# Altium PCB slave_card_pcb.PcbDoc (part 1 of 2)
Units mm, origin at the board's own origin, x right, y up, seen from the top; angles counter-clockwise.
Board outline 165 x 187.5 mm, 4 copper layers (Top Layer, Int1 (GND), Int2 (PWR), Bottom Layer), stack 1.369 mm thick; 87 components, 83 nets, 381 pads, 109 vias.
Unrouted connection lines stored in the file: 1.
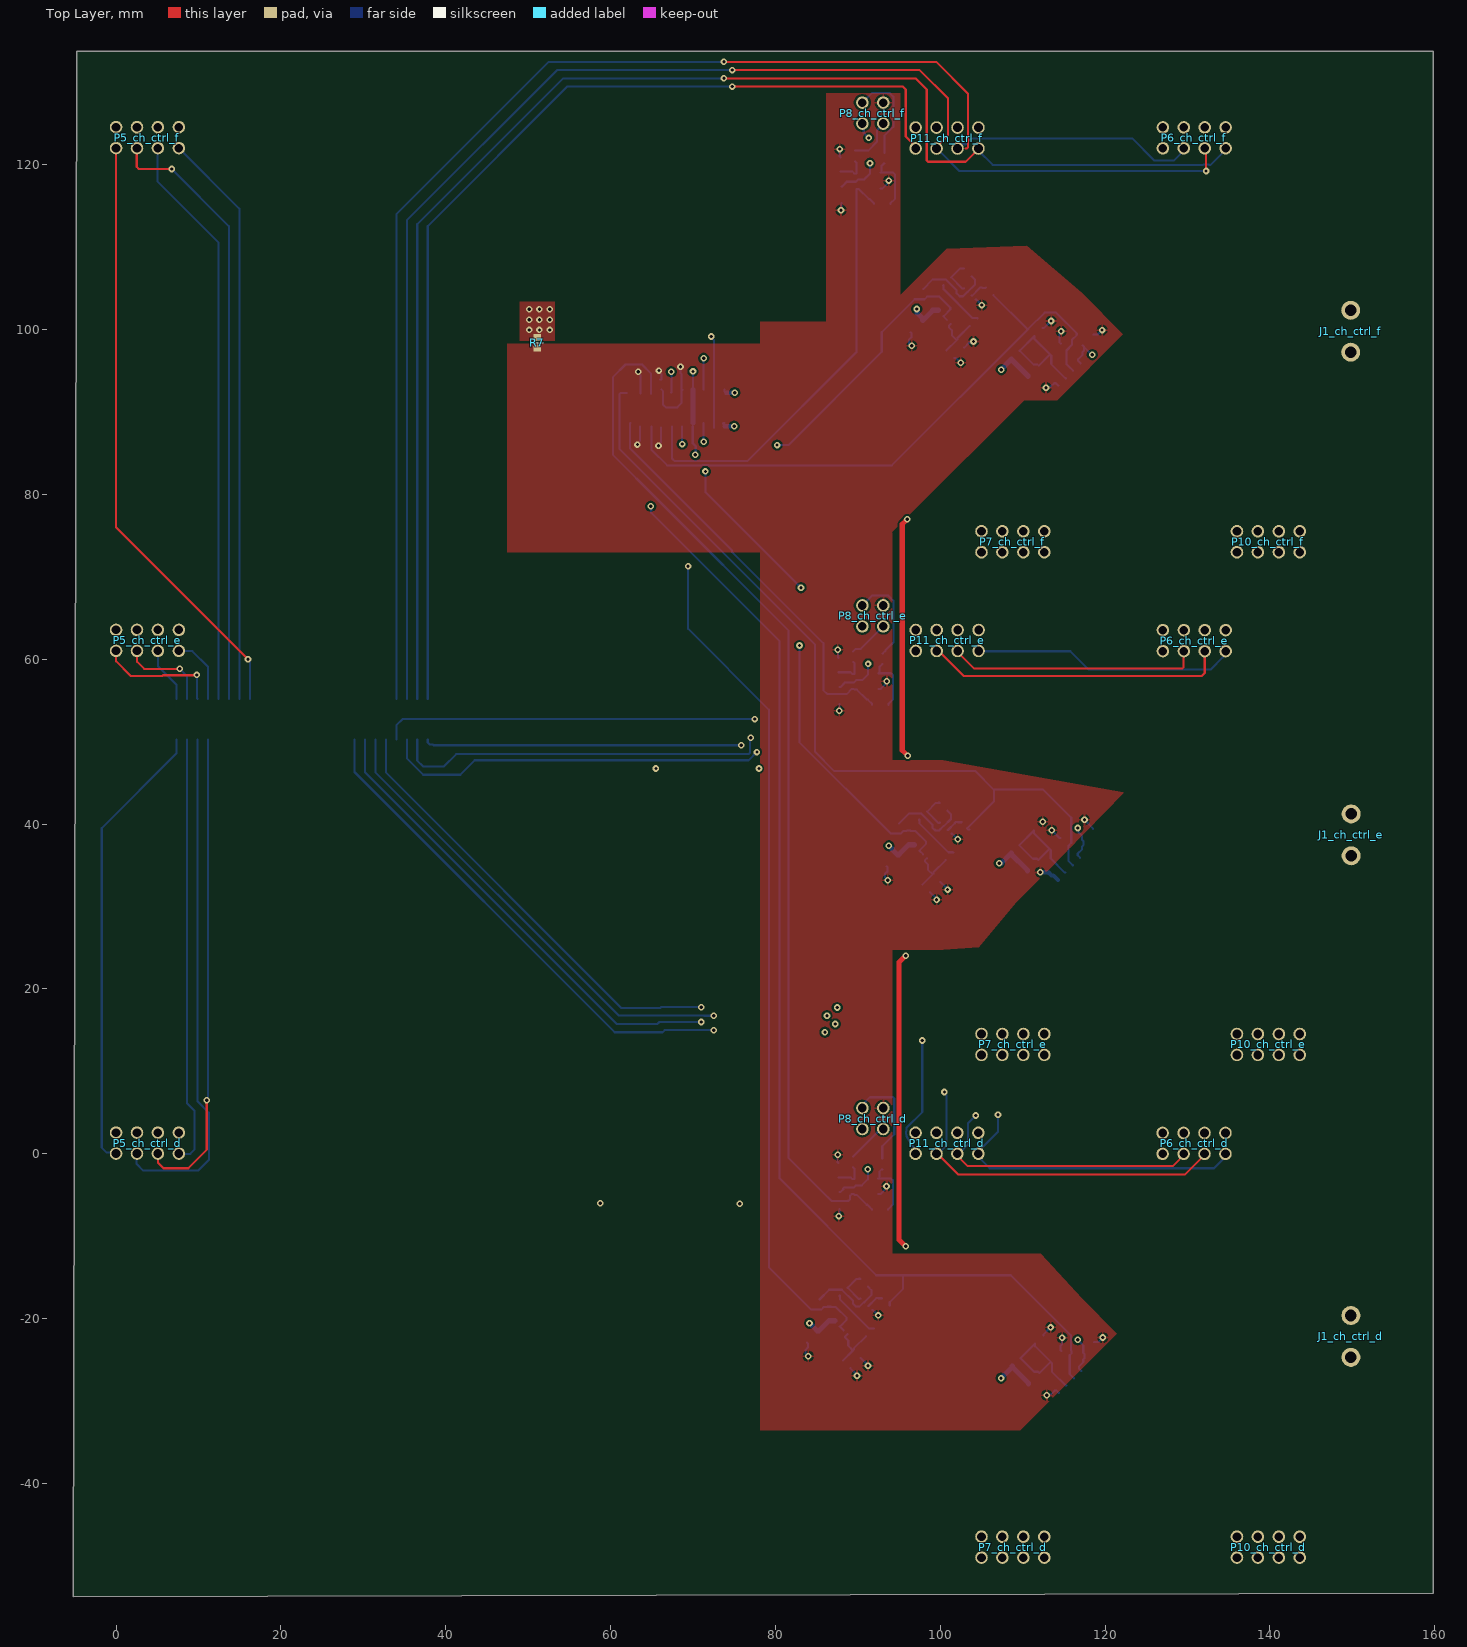
[diagram p0: Top Layer view]
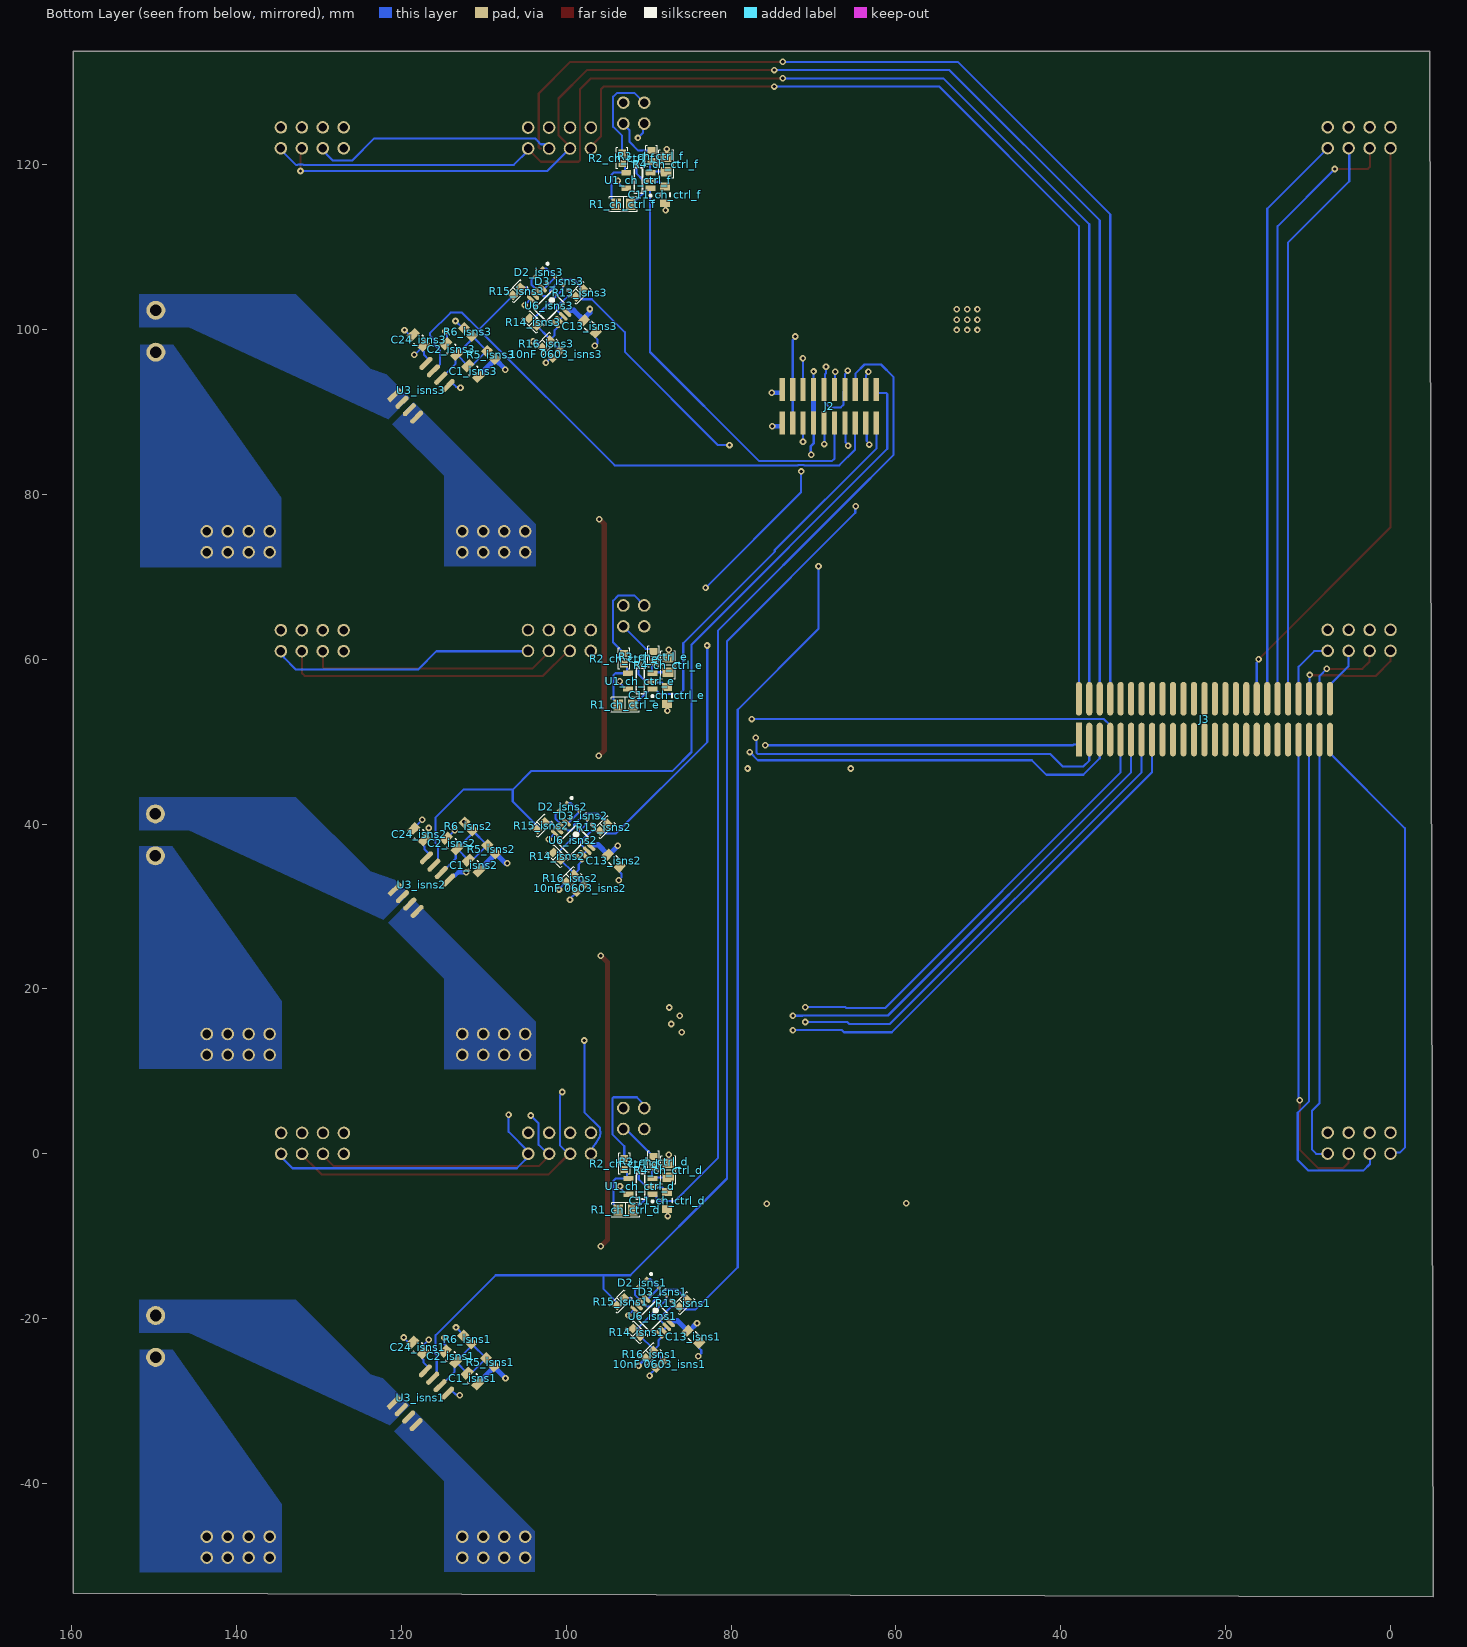
[diagram p1: Bottom Layer view, seen from below]
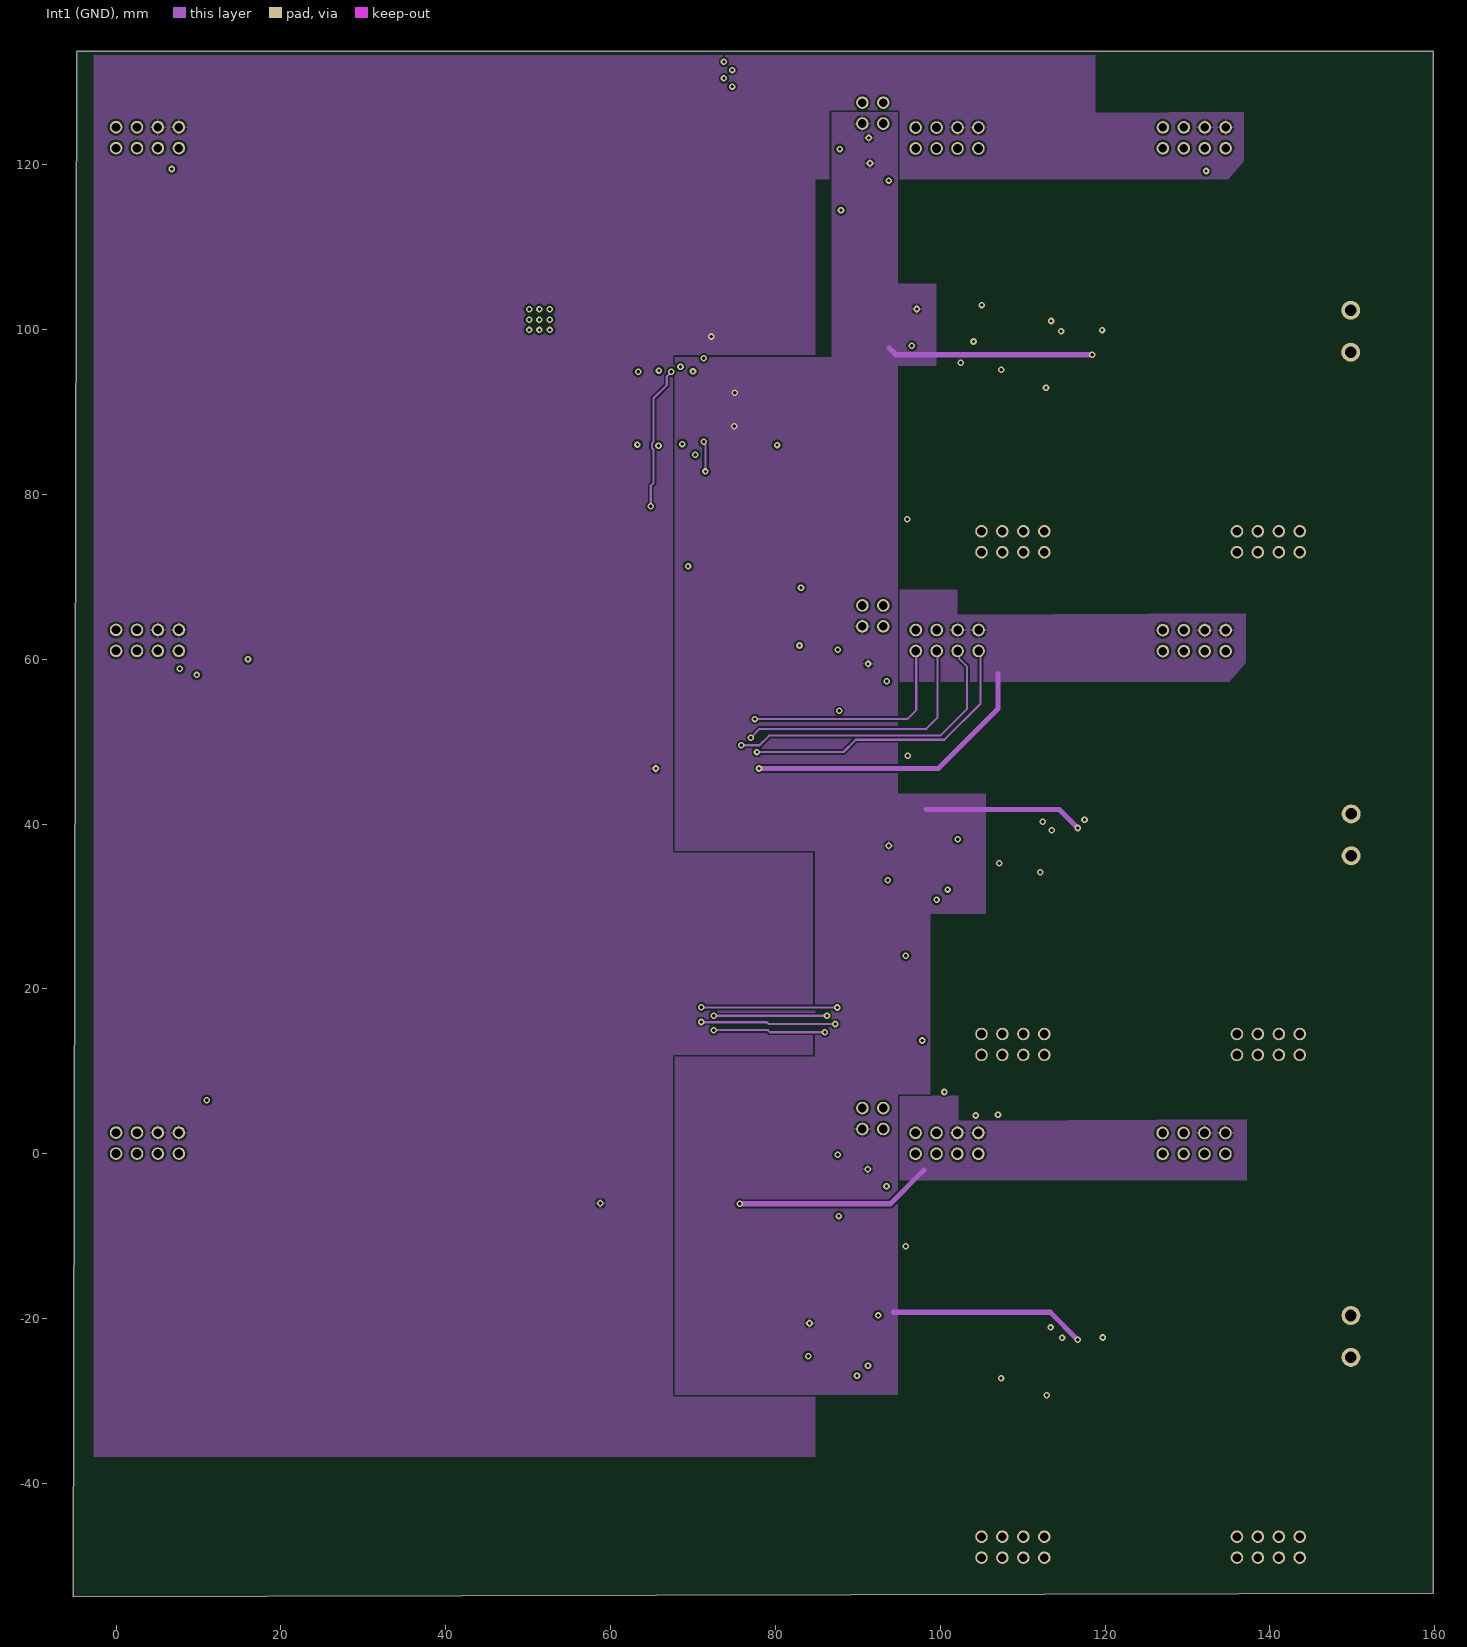
[diagram p2: Int1 (GND)]
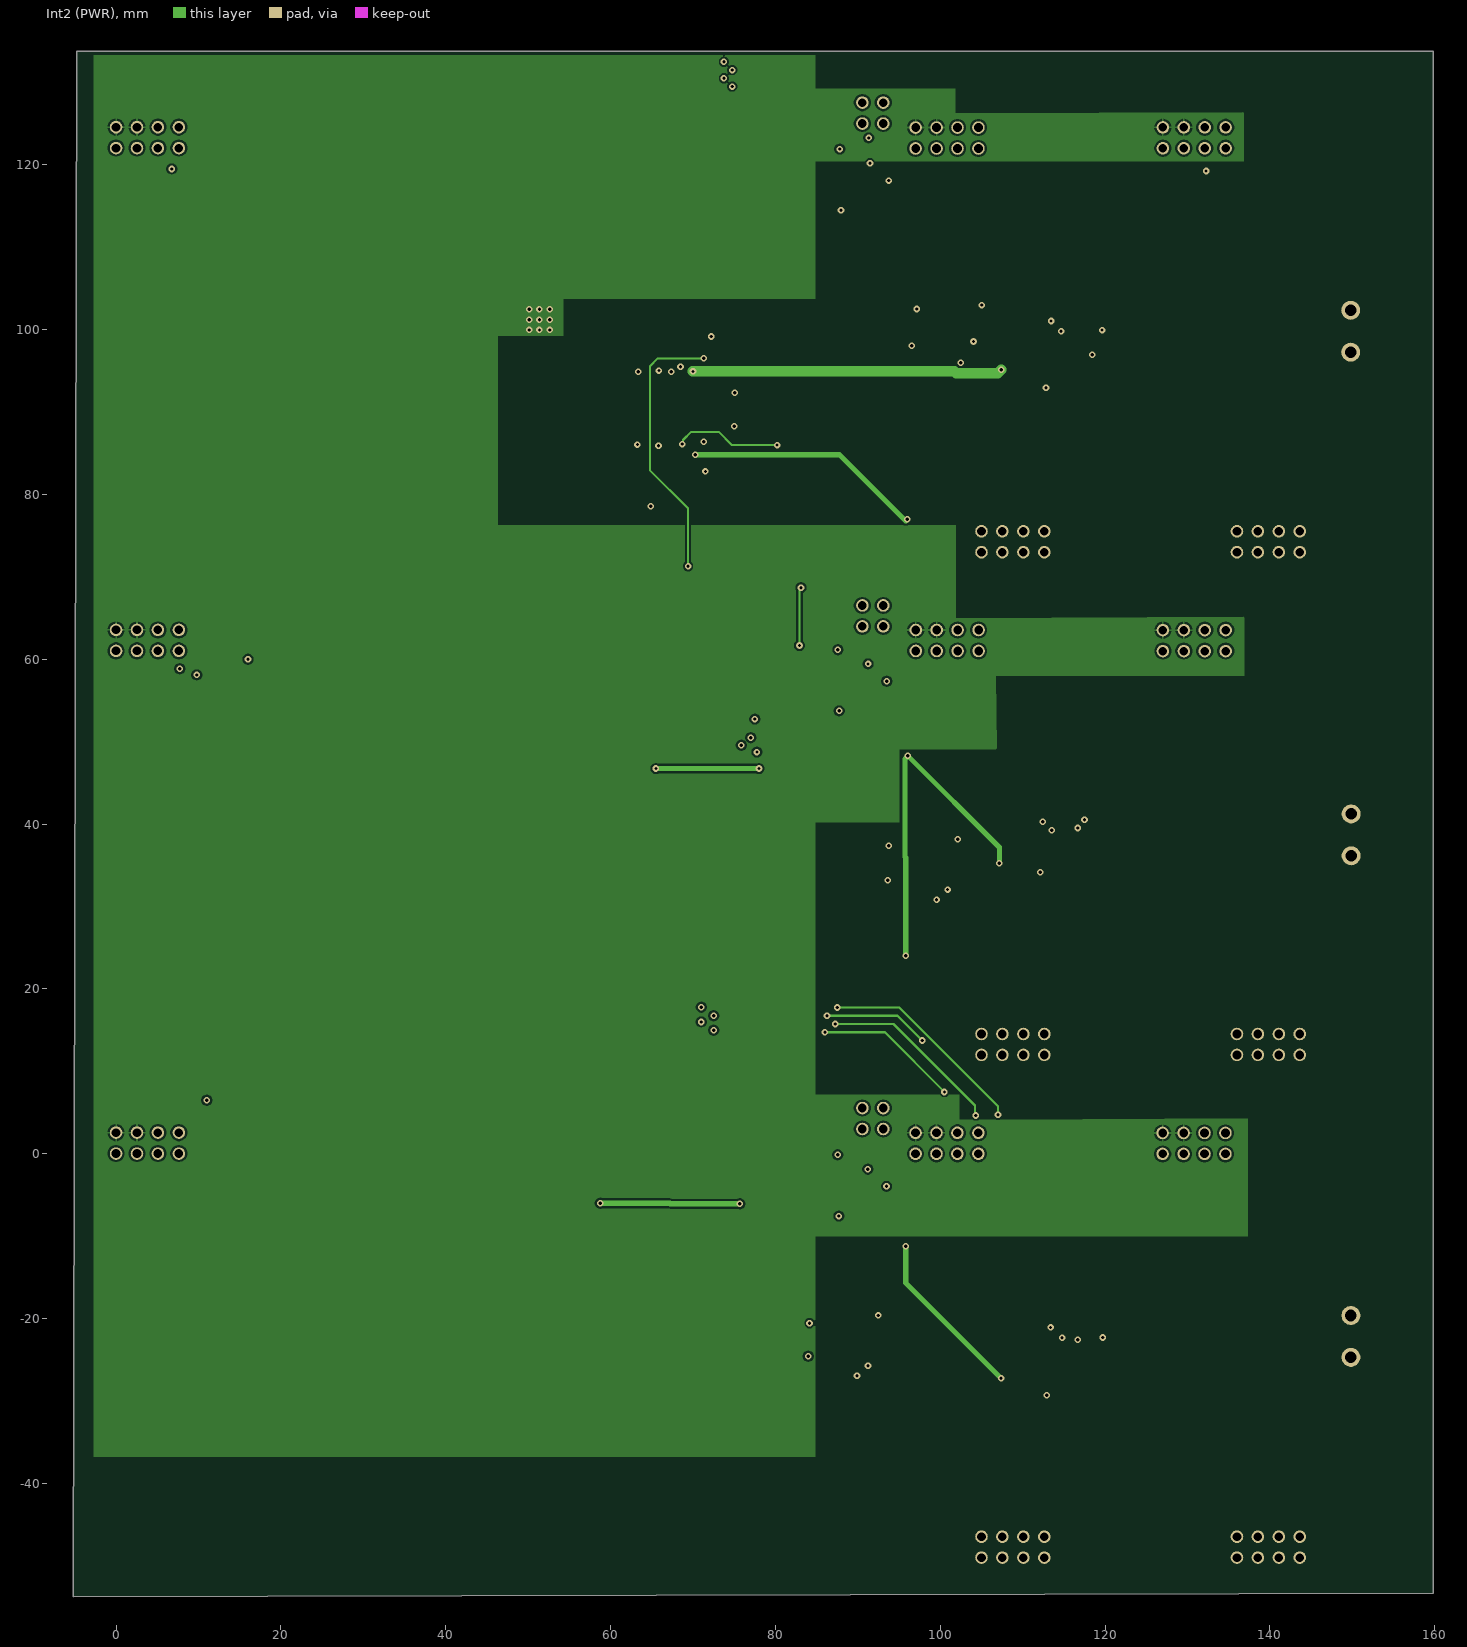
[diagram p3: Int2 (PWR)]
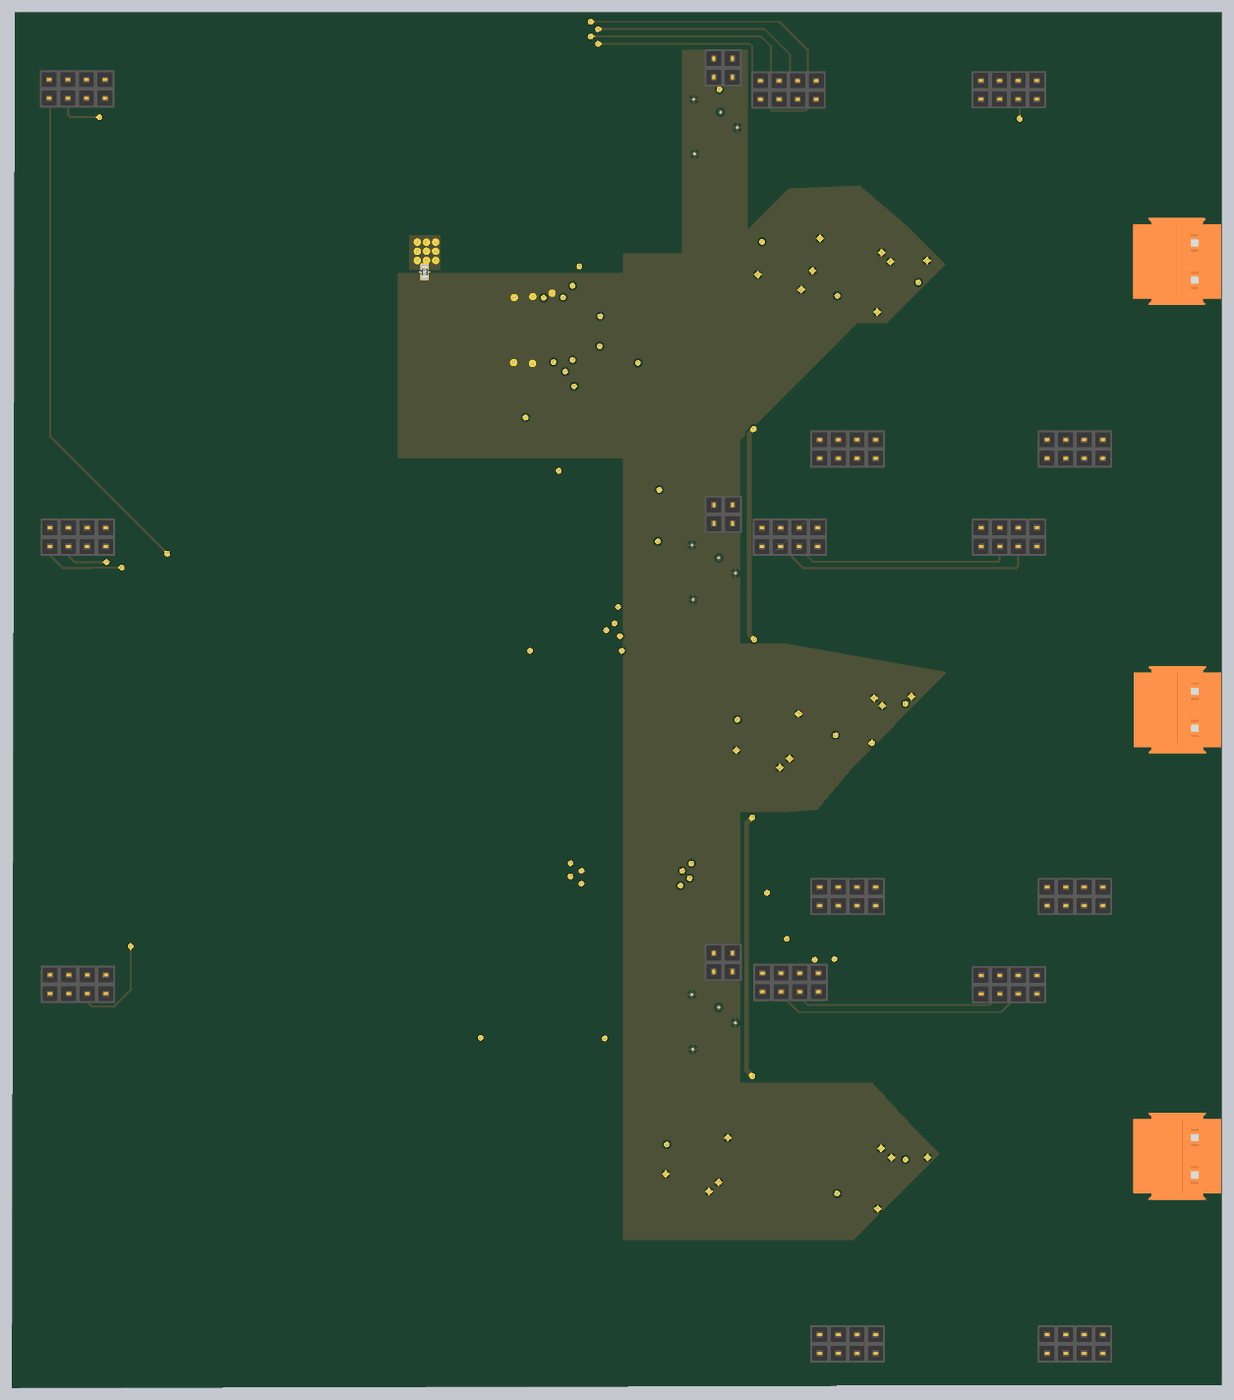
[diagram p5: 3D render of the assembled board from above, using the file's embedded part models]
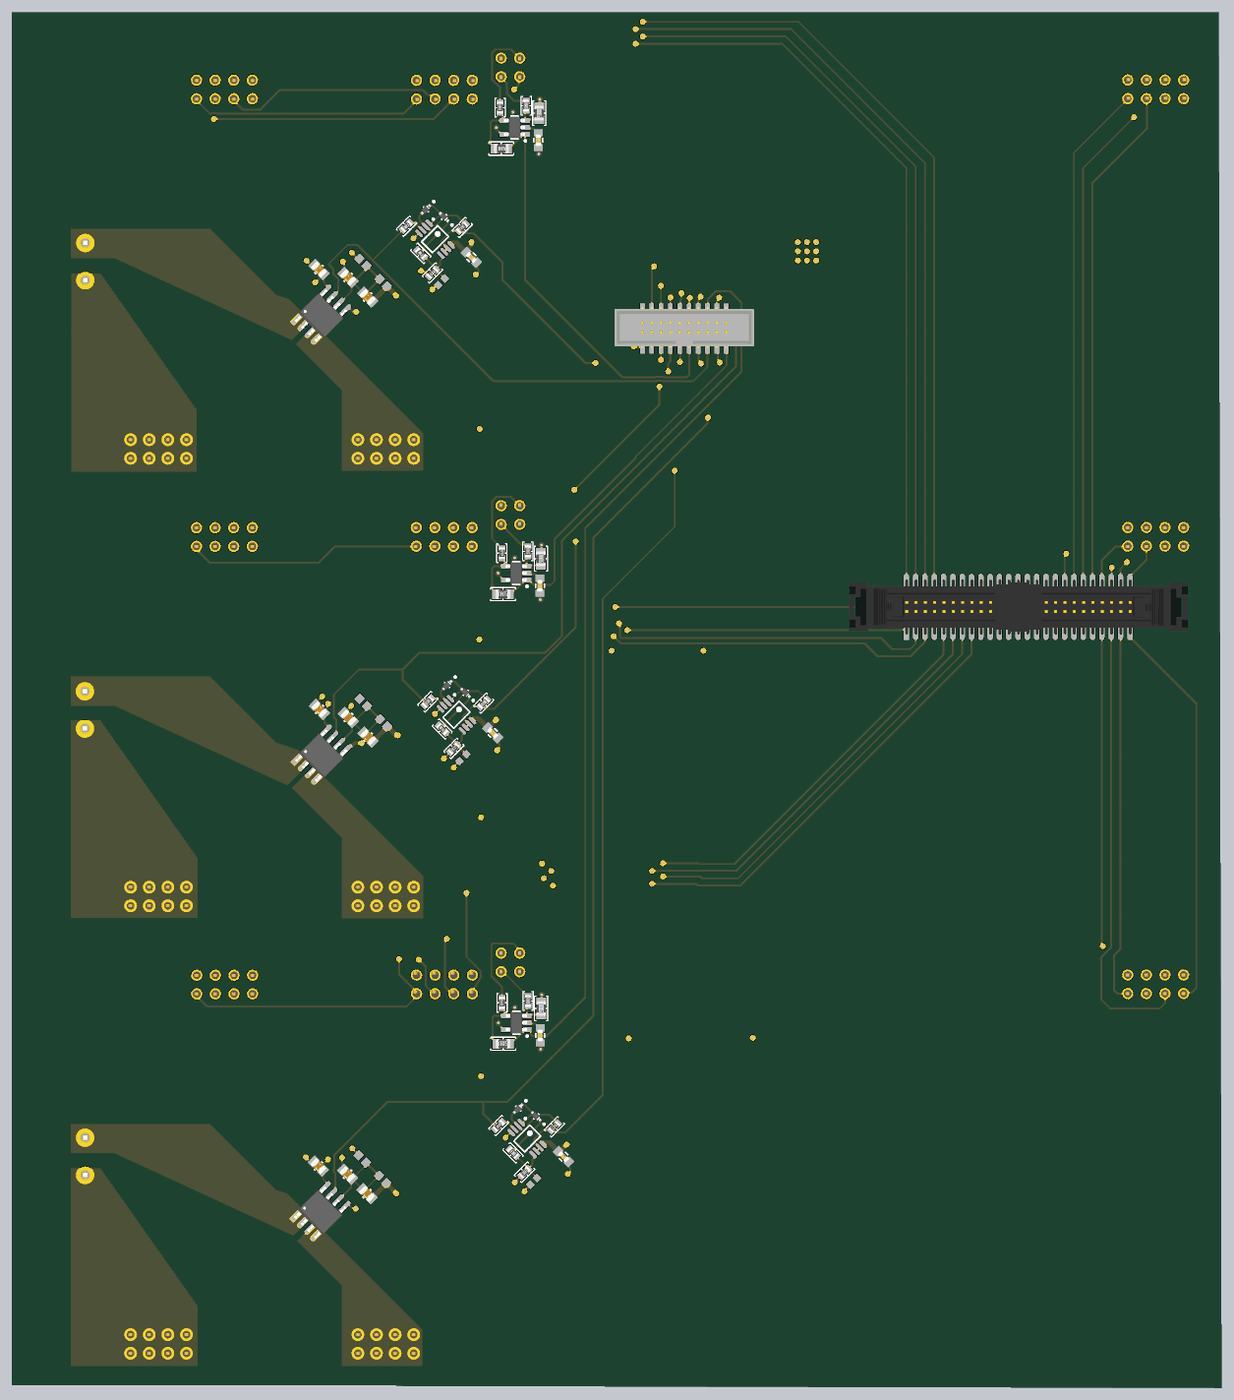
[diagram p6: 3D render of the assembled board from below, using the file's embedded part models]

## Layer stack, top to bottom
Top Solder: solder mask 0.0254, SM-001, Dk 4
Top Layer: signal copper 0.035
Dielectric 1: prepreg 0.1295, PP-017, Dk 4.3
Dielectric 2: prepreg 0.1295, PP-017, Dk 4.3
Int1 (GND): signal copper 0.035
Dielectric 3: core 0.7112, Core-039, Dk 4.8
Int2 (PWR): signal copper 0.035
Dielectric 4: prepreg 0.1295, PP-017, Dk 4.3
Dielectric 5: prepreg 0.1295, PP-017, Dk 4.3
Bottom Layer: signal copper 0.035
Bottom Solder: solder mask 0.0254, SM-001, Dk 4

## Board outline
-5.19,-53.73 159.81,-53.33 159.81,133.77 -4.79,133.77

## Design rules (kind name [scope] priority, off if disabled: settings)
Clearance low_clearance [All vs InPadClass('low_clearance')] p1: gap=0.152 ignorepadtopadclearanceinfootprint=FALSE
Clearance Clearance_1 [All] p2: gap=0.254 ignorepadtopadclearanceinfootprint=FALSE
Height [All] p1: minheight=0 maxheight=1270 prefheight=12.7
HoleSize [All] p1: absolutevalues=TRUE maxlimit=127 minlimit=0.025 maxpercent=80.000 minpercent=20.000
MinimumSolderMaskSliver small_sliver [InPadClass('low_clearance')] p1: minsoldermaskwidth=0.076
MinimumSolderMaskSliver MinimumSolderMaskSliver_1 [All] p2: minsoldermaskwidth=0.152
PolygonConnect [All] p1: connectstyle=Relief reliefconductorwidth=0.254 reliefentries=4 polygonreliefangle="90 Angle" airgapwidth=0.254
RoutingVias [All] p1: holewidth=0.254 width=0.508 viastyle="Through Hole" minholewidth=0.4 minwidth=0.8 maxholewidth=0.711 maxwidth=1.27
SilkToSolderMaskClearance [IsPad] p1: minsilkscreentomaskgap=0.051 clearancetoexposedcopper=TRUE
SolderMaskExpansion [All] p1: expansion=0.102 istentingtop=FALSE
Width [All] p1: maxlimit=2.54 minlimit=0.254 preferedwidth=0.254
26 further rules are at their usual default settings.

## Classes and differential pairs
pad class low_clearance: U1_ch_ctrl_d-1 U1_ch_ctrl_d-2 U1_ch_ctrl_d-3 U1_ch_ctrl_d-4 U1_ch_ctrl_d-5 U1_ch_ctrl_e-1 U1_ch_ctrl_e-2 U1_ch_ctrl_e-3 U1_ch_ctrl_e-4 U1_ch_ctrl_e-5 U1_ch_ctrl_f-1 U1_ch_ctrl_f-2 U1_ch_ctrl_f-3 U1_ch_ctrl_f-4 U1_ch_ctrl_f-5 U3_isns1-1 U3_isns1-2 U3_isns1-3 U3_isns1-4 U3_isns1-5 U3_isns1-6 U3_isns1-7 U3_isns1-8 U3_isns2-1 U3_isns2-2 U3_isns2-3 U3_isns2-4 U3_isns2-5 U3_isns2-6 U3_isns2-7 U3_isns2-8 U3_isns3-1 U3_isns3-2 U3_isns3-3 U3_isns3-4 U3_isns3-5 U3_isns3-6 U3_isns3-7 U3_isns3-8 U6_isns1-1 U6_isns1-2 U6_isns1-3 U6_isns1-4 U6_isns1-5 U6_isns1-6 U6_isns1-7 U6_isns1-8 U6_isns2-1 U6_isns2-2 U6_isns2-3 U6_isns2-4 U6_isns2-5 U6_isns2-6 U6_isns2-7 U6_isns2-8 U6_isns3-1 U6_isns3-2 U6_isns3-3 U6_isns3-4 U6_isns3-5 U6_isns3-6 U6_isns3-7 U6_isns3-8
channel class current_sense: isns1 isns2 isns3
channel class channel_ctrl: ch_ctrl_d ch_ctrl_e ch_ctrl_f
component class isns3: "10nF 0603_isns3" C1_isns3 C2_isns3 C13_isns3 C24_isns3 D2_isns3 D3_isns3 R5_isns3 R6_isns3 R13_isns3 R14_isns3 R15_isns3 R16_isns3 U3_isns3 U6_isns3
component class isns2: "10nF 0603_isns2" C1_isns2 C2_isns2 C13_isns2 C24_isns2 D2_isns2 D3_isns2 R5_isns2 R6_isns2 R13_isns2 R14_isns2 R15_isns2 R16_isns2 U3_isns2 U6_isns2
component class isns1: "10nF 0603_isns1" C1_isns1 C2_isns1 C13_isns1 C24_isns1 D2_isns1 D3_isns1 R5_isns1 R6_isns1 R13_isns1 R14_isns1 R15_isns1 R16_isns1 U3_isns1 U6_isns1
component class ch_ctrl_f: C11_ch_ctrl_f J1_ch_ctrl_f P5_ch_ctrl_f P6_ch_ctrl_f P7_ch_ctrl_f P8_ch_ctrl_f P10_ch_ctrl_f P11_ch_ctrl_f R1_ch_ctrl_f R2_ch_ctrl_f R3_ch_ctrl_f R4_ch_ctrl_f U1_ch_ctrl_f
component class ch_ctrl_e: 115 C11_ch_ctrl_e J1_ch_ctrl_e P5_ch_ctrl_e P6_ch_ctrl_e P7_ch_ctrl_e P8_ch_ctrl_e P10_ch_ctrl_e P11_ch_ctrl_e R1_ch_ctrl_e R2_ch_ctrl_e R3_ch_ctrl_e R4_ch_ctrl_e U1_ch_ctrl_e
component class ch_ctrl_d: C11_ch_ctrl_d J1_ch_ctrl_d P5_ch_ctrl_d P6_ch_ctrl_d P7_ch_ctrl_d P8_ch_ctrl_d P10_ch_ctrl_d P11_ch_ctrl_d R1_ch_ctrl_d R2_ch_ctrl_d R3_ch_ctrl_d R4_ch_ctrl_d U1_ch_ctrl_d
component class tnb_mns_slave: J2 J3 R7

## Components (designator, comment, footprint, x,y, rotation, side; value= is the part's Value field where it differs from the comment)
"10nF 0603_isns1" "06035C-103KAT2A" CAPC1608X90X35LL15T15 88.637,-25.556 r135 bottom (schematic designator "10nF 0603")
"10nF 0603_isns2" "06035C-103KAT2A" CAPC1608X90X35LL15T15 98.29,32.21 r135 bottom (schematic designator "10nF 0603")
"10nF 0603_isns3" "06035C-103KAT2A" CAPC1608X90X35LL15T15 101.21,97.04 r135 bottom (schematic designator "10nF 0603")
C1_isns1 "100nF 25V 0805" FP-CC0805-0_85-MFG 111.372,-27.257 r225 bottom value="100 nF" (schematic designator C1)
C1_isns2 "100nF 25V 0805" FP-CC0805-0_85-MFG 111.234,34.995 r225 bottom value="100 nF" (schematic designator C1)
C1_isns3 "100nF 25V 0805" FP-CC0805-0_85-MFG 111.29,94.984 r225 bottom value="100 nF" (schematic designator C1)
C2_isns1 "100nF 25V 0805" FP-CC0805-0_85-MFG 114.041,-24.587 r225 bottom value="100 nF" (schematic designator C2)
C2_isns2 "100nF 25V 0805" FP-CC0805-0_85-MFG 113.904,37.665 r225 bottom value="100 nF" (schematic designator C2)
C2_isns3 "100nF 25V 0805" FP-CC0805-0_85-MFG 113.96,97.653 r225 bottom value="100 nF" (schematic designator C2)
C11_ch_ctrl_d "0603 50V 100nF" FP-CGA3E-0_3-0_1-IPC_A 87.755,-5.673 r270 bottom (schematic designator C11)
C11_ch_ctrl_e "0603 50V 100nF" FP-CGA3E-0_3-0_1-IPC_A 87.782,55.623 r270 bottom (schematic designator C11)
C11_ch_ctrl_f "0603 50V 100nF" FP-CGA3E-0_3-0_1-IPC_A 88.012,116.369 r270 bottom (schematic designator C11)
C13_isns1 "0603 50V 100nF" FP-CGA3E-0_3-0_1-IPC_A 84.571,-22.197 r225 bottom (schematic designator C13)
C13_isns2 "0603 50V 100nF" FP-CGA3E-0_3-0_1-IPC_A 94.225,35.568 r225 bottom (schematic designator C13)
C13_isns3 "0603 50V 100nF" FP-CGA3E-0_3-0_1-IPC_A 97.144,100.399 r225 bottom (schematic designator C13)
C24_isns1 "100nF 25V 0805" FP-CC0805-0_85-MFG 118.002,-23.49 r225 bottom value="100 nF" (schematic designator C24)
C24_isns2 "100nF 25V 0805" FP-CC0805-0_85-MFG 117.864,38.762 r225 bottom value="100 nF" (schematic designator C24)
C24_isns3 "100nF 25V 0805" FP-CC0805-0_85-MFG 117.92,98.75 r225 bottom value="100 nF" (schematic designator C24)
D2_isns1 "1N914BWT" FP-502-01-MFG 90.758,-15.656 r315 bottom value=4pF (schematic designator D2)
D2_isns2 "1N914BWT" FP-502-01-MFG 100.412,42.109 r315 bottom value=4pF (schematic designator D2)
D2_isns3 "1N914BWT" FP-502-01-MFG 103.331,106.94 r315 bottom value=4pF (schematic designator D2)
D3_isns1 "1N914BWT" FP-502-01-MFG 88.283,-16.717 r45 bottom value=4pF (schematic designator D3)
D3_isns2 "1N914BWT" FP-502-01-MFG 97.937,41.048 r45 bottom value=4pF (schematic designator D3)
D3_isns3 "1N914BWT" FP-502-01-MFG 100.856,105.879 r45 bottom value=4pF (schematic designator D3)
J1_ch_ctrl_d "weidmuller_20A_2p_f" weidmuller_19A_2p_m 149.826,-24.698 r90 top (schematic designator J1)
J1_ch_ctrl_e "weidmuller_20A_2p_f" weidmuller_19A_2p_m 149.852,36.161 r90 top (schematic designator J1)
J1_ch_ctrl_f "weidmuller_20A_2p_f" weidmuller_19A_2p_m 149.801,97.273 r90 top (schematic designator J1)
J2 "pin_connector_20_m" PIN_20_MALE_3220-20-0300-00 73.81,95.27 r270 bottom locked
J3 "pin_header_50_male_smd" pin_connector_50_m_1.27_smd 37.81,50.27 r90 bottom locked
P5_ch_ctrl_d "buck_connector" header_4_2_f#1 3.8,1.3 r180 top locked (schematic designator P5)
P5_ch_ctrl_e "buck_connector" header_4_2_f#1 3.8,62.3 r180 top locked (schematic designator P5)
P5_ch_ctrl_f "buck_connector" header_4_2_f#1 3.8,123.3 r180 top locked (schematic designator P5)
P6_ch_ctrl_d "lega_connector" header_4_2_f#1 130.792,1.261 r180 top locked (schematic designator P6)
P6_ch_ctrl_e "lega_connector" header_4_2_f#1 130.822,62.27 r180 top locked (schematic designator P6)
P6_ch_ctrl_f "lega_connector" header_4_2_f#1 130.818,123.283 r180 top locked (schematic designator P6)
P7_ch_ctrl_d "Header 8" header_4_2_f#2 108.81,-47.73 r0 top locked (schematic designator P7)
P7_ch_ctrl_e "Header 8" header_4_2_f#2 108.81,13.27 r0 top locked (schematic designator P7)
P7_ch_ctrl_f "Header 8" header_4_2_f#2 108.81,74.27 r0 top locked (schematic designator P7)
P8_ch_ctrl_d "Header 4" header_2_2_f 91.813,4.284 r270 top locked (schematic designator P8)
P8_ch_ctrl_e "Header 4" header_2_2_f 91.813,65.269 r270 top (schematic designator P8)
P8_ch_ctrl_f "Header 4" header_2_2_f 91.813,126.28 r270 top (schematic designator P8)
P10_ch_ctrl_d "Header 8" header_4_2_f#2 139.81,-47.73 r0 top locked (schematic designator P10)
P10_ch_ctrl_e "Header 8" header_4_2_f#2 139.81,13.27 r0 top locked (schematic designator P10)
P10_ch_ctrl_f "Header 8" header_4_2_f#2 139.81,74.27 r0 top locked (schematic designator P10)
P11_ch_ctrl_d "legb_connector" header_4_2_f#1 100.809,1.279 r180 top locked (schematic designator P11)
P11_ch_ctrl_e "legb_connector" header_4_2_f#1 100.838,62.29 r180 top locked (schematic designator P11)
P11_ch_ctrl_f "legb_connector" header_4_2_f#1 100.82,123.257 r180 top locked (schematic designator P11)
R1_ch_ctrl_d "Res1" "RES 0805_2012" 92.804,-6.816 r180 bottom value=1K (schematic designator R1)
R1_ch_ctrl_e "Res1" "RES 0805_2012" 92.831,54.48 r180 bottom value=1K (schematic designator R1)
R1_ch_ctrl_f "Res1" "RES 0805_2012" 93.061,115.226 r180 bottom value=1K (schematic designator R1)
R2_ch_ctrl_d "Res1" "RES 0603_1608" 92.962,-1.228 r270 bottom value=1K (schematic designator R2)
R2_ch_ctrl_e "Res1" "RES 0603_1608" 92.989,60.068 r270 bottom value=1K (schematic designator R2)
R2_ch_ctrl_f "Res1" "RES 0603_1608" 93.219,120.814 r270 bottom value=1K (schematic designator R2)
R3_ch_ctrl_d "Res1" "RES 0603_1608" 89.406,-0.974 r270 bottom value=1K (schematic designator R3)
R3_ch_ctrl_e "Res1" "RES 0603_1608" 89.433,60.322 r270 bottom value=1K (schematic designator R3)
R3_ch_ctrl_f "Res1" "RES 0603_1608" 89.663,121.068 r270 bottom value=1K (schematic designator R3)
R4_ch_ctrl_d "Res1" "RES 0805_2012" 87.628,-1.99 r270 bottom value=1K (schematic designator R4)
R4_ch_ctrl_e "Res1" "RES 0805_2012" 87.655,59.306 r270 bottom value=1K (schematic designator R4)
R4_ch_ctrl_f "Res1" "RES 0805_2012" 87.885,120.052 r270 bottom value=1K (schematic designator R4)
R5_isns1 "10k 0603 0.1%" RESC1608X55X30ML20T20 109.233,-25.294 r225 bottom (schematic designator R5)
R5_isns2 "10k 0603 0.1%" RESC1608X55X30ML20T20 109.095,36.958 r225 bottom (schematic designator R5)
R5_isns3 "10k 0603 0.1%" RESC1608X55X30ML20T20 109.151,96.946 r225 bottom (schematic designator R5)
R6_isns1 "10k 0603 0.1%" RESC1608X55X30ML20T20 112.008,-22.519 r225 bottom (schematic designator R6)
R6_isns2 "10k 0603 0.1%" RESC1608X55X30ML20T20 111.871,39.733 r225 bottom (schematic designator R6)
R6_isns3 "10k 0603 0.1%" RESC1608X55X30ML20T20 111.927,99.721 r225 bottom (schematic designator R6)
R7 "0" "RES 0603_1608" 51.1,98.4 r90 top
R13_isns1 "0603 10k" "RES 0603_1608" 85.808,-18.131 r315 bottom value=1K (schematic designator R13)
R13_isns2 "0603 10k" "RES 0603_1608" 95.462,39.634 r315 bottom value=1K (schematic designator R13)
R13_isns3 "0603 10k" "RES 0603_1608" 98.381,104.465 r315 bottom value=1K (schematic designator R13)
R14_isns1 "0603 100" "RES 0603_1608" 91.465,-21.666 r225 bottom value=1K (schematic designator R14)
R14_isns2 "0603 100" "RES 0603_1608" 101.119,36.099 r225 bottom value=1K (schematic designator R14)
R14_isns3 "0603 100" "RES 0603_1608" 104.038,100.929 r225 bottom value=1K (schematic designator R14)
R15_isns1 "0603 Jumper" "RES 0603_1608" 93.41,-17.954 r135 bottom value=1K (schematic designator R15)
R15_isns2 "0603 Jumper" "RES 0603_1608" 103.063,39.811 r135 bottom value=1K (schematic designator R15)
R15_isns3 "0603 Jumper" "RES 0603_1608" 105.983,104.642 r135 bottom value=1K (schematic designator R15)
R16_isns1 "0603 100k" "RES 0603_1608" 89.874,-24.318 r135 bottom value=1K (schematic designator R16)
R16_isns2 "0603 100k" "RES 0603_1608" 99.528,33.447 r135 bottom value=1K (schematic designator R16)
R16_isns3 "0603 100k" "RES 0603_1608" 102.447,98.278 r135 bottom value=1K (schematic designator R16)
U1_ch_ctrl_d "LMC7101QM5X/NOPB" DBV0005A_M 90.997,-3.937 r0 bottom (schematic designator U1)
U1_ch_ctrl_e "LMC7101QM5X/NOPB" DBV0005A_M 91.024,57.359 r0 bottom (schematic designator U1)
U1_ch_ctrl_f "LMC7101QM5X/NOPB" DBV0005A_M 91.254,118.105 r0 bottom (schematic designator U1)
U3_isns1 "TMCS1100A1QDR" SOIC8 120.924,-30.152 r135 bottom (schematic designator U3)
U3_isns2 "TMCS1100A1QDR" SOIC8 120.787,32.1 r135 bottom (schematic designator U3)
U3_isns3 "TMCS1100A1QDR" SOIC8 120.843,92.088 r135 bottom (schematic designator U3)
U6_isns1 "LTC6244HMS8#TRPBF" LT-MS8-8_L 89.521,-19.722 r225 bottom (schematic designator U6)
U6_isns2 "LTC6244HMS8#TRPBF" LT-MS8-8_L 99.174,38.043 r225 bottom (schematic designator U6)
U6_isns3 "LTC6244HMS8#TRPBF" LT-MS8-8_L 102.093,102.874 r225 bottom (schematic designator U6)

## Footprints (in the part's own frame and the unit in brackets; to place one, negate y for a bottom-side part, rotate by r counter-clockwise, add the part's x,y. Pads: shape width x height; smd on the part's side, far side on the other; paste and mask are expansions set on the pad)
CAPC1608X90X35LL15T15 [mm] "Chip Capacitor, 2-Leads, Body 1.60x0.81mm, IPC High Density"
  rect 0.85x0.9 smd: 1(-0.65,0) 2(0.65,0)
  body extent -0.88,-0.48 0.88,0.48, height 0.9
DBV0005A_M [mm] "SOT23, 5-Leads, Body 3.05x1.75mm, Pitch 0.95mm, IPC Low Density"
  rrect15% 1.2x0.65 smd: 1(-1.475,0.95) 2(-1.475,0) 3(-1.475,-0.95) 4(1.475,-0.95) 5(1.475,0.95)
  silkscreen extent -1.6,-1.55 0.5,1.95, body extent -1.42,-1.46 1.42,1.46, height 1.08
FP-502-01-MFG [mm]
  rect 0.48x0.4 smd paste+0 mask+0: 1(-0.66,0) 2(0.66,0)
  silkscreen extent -1.62,-0.45 0.05,0.45, body extent -0.8,-0.4 0.8,0.4, height 0.7
FP-CC0805-0_85-MFG [mm]
  rect 0.95x1.4 smd paste+0 mask+0: 1(-0.925,0) 2(0.925,0)
  silkscreen extent -0.08,-0.72 0.08,0.72, body extent -1,-0.63 1,0.63, height 0.95
FP-CGA3E-0_3-0_1-IPC_A [mm]
  rect 0.956x1.206 smd paste+0 mask+0: 1(-1.025,0) 2(1.025,0)
  silkscreen extent -0.25,-0.6 0.25,0.6, body extent -0.8,-0.4 0.8,0.4, height 1.1
header_2_2_f [mil]
  round 60 hole 41.34: 1(-50,50) 2(-50,-50) 3(50,50) 4(50,-50)
  body extent -100,-100 100,100, height 335
header_4_2_f#1 [mil]
  round 60 hole 41.34: 1(-150,50) 2(-150,-50) 3(-50,50) 4(-50,-50) 5(50,50) 6(50,-50) 7(150,50) 8(150,-50)
  body extent -201,-100 199,100, height 335
header_4_2_f#2 [mil]
  round 60 hole 41.34: 1(-150,-50) 2(-150,50) 3(-50,-50) 4(-50,50) 5(50,-50) 6(50,50) 7(150,-50) 8(150,50)
  body extent -200,-100 200,100, height 335
LT-MS8-8_L [mm] "SOP, 8-Leads, Body 3x3mm, Pitch 0.65mm, IPC High Density"
  oval 1.3x0.45 smd: 1(-2.1,0.975) 2(-2.1,0.325) 3(-2.1,-0.325) 4(-2.1,-0.975) 5(2.1,-0.975) 6(2.1,-0.325) 7(2.1,0.325) 8(2.1,0.975)
  silkscreen extent -2.22,-1.55 1.05,1.87, body extent -1.55,-1.55 1.55,1.55, height 1.1
PIN_20_MALE_3220-20-0300-00 [mm]
  rect 2.77x0.65 smd: 1(2.54,0) 2(6.604,0) 3(2.54,1.27) 4(6.604,1.27) 5(2.54,2.54) 6(6.604,2.54) 7(2.54,3.81) 8(6.604,3.81) 9(2.54,5.08) 10(6.604,5.08) 11(2.54,6.35) 12(6.604,6.35) 13(2.54,7.62) 14(6.604,7.62) 15(2.54,8.89) 16(6.604,8.89) 17(2.54,10.16) 18(6.604,10.16) 19(2.54,11.43) 20(6.604,11.43)
  body extent 1.69,-3.78 7.19,15.22, height 5.4
pin_connector_50_m_1.27_smd [mm]
  rect 4.09x0.74 smd: 1(0,0)
  oval 4.09x0.74 smd: 2(0,-1.27) 3(0,-2.54) 4(0,-3.81) 5(0,-5.08) 6(0,-6.35) 7(0,-7.62) 8(0,-8.89) 9(0,-10.16) 10(0,-11.43) 11(0,-12.7) 12(0,-13.97) 13(0,-15.24) 14(0,-16.51) 15(0,-17.78) 16(0,-19.05) 17(0,-20.32) 18(0,-21.59) 19(0,-22.86) 20(0,-24.13) 21(0,-25.4) 22(0,-26.67) 23(0,-27.94) 24(0,-29.21) 25(0,-30.48) 26(4.95,-30.48) 27(4.95,-29.21) 28(4.95,-27.94) 29(4.95,-26.67) 30(4.95,-25.4) 31(4.95,-24.13) 32(4.95,-22.86) 33(4.95,-21.59) 34(4.95,-20.32) 35(4.95,-19.05) 36(4.95,-17.78) 37(4.95,-16.51) 38(4.95,-15.24) 39(4.95,-13.97) 40(4.95,-12.7) 41(4.95,-11.43) 42(4.95,-10.16) 43(4.95,-8.89) 44(4.95,-7.62) 45(4.95,-6.35) 46(4.95,-5.08) 47(4.95,-3.81) 48(4.95,-2.54) 49(4.95,-1.27) 50(4.95,0)
  body extent -1.3,-38.42 6.22,7.82, height 11.67
"RES 0603_1608" [mm] "Chip Resistor, 2-Leads, Body 1.60x0.80mm, IPC Medium Density"
  rect 0.85x0.95 smd: 1(-0.65,0) 2(0.65,0)
  silkscreen extent -1.27,-0.7 1.27,0.7, body extent -0.8,-0.4 0.8,0.4, height 0.45
"RES 0805_2012" [mm] "Chip Resistor, 2-Leads, Body 2.00x1.25mm, IPC Medium Density"
  rect 1.15x1.35 smd: 1(-0.875,0) 2(0.875,0)
  silkscreen extent -1.7,-0.9 1.7,0.9, body extent -1,-0.62 1,0.63, height 0.6
RESC1608X55X30ML20T20 [mm] "Chip Resistor, 2-Leads, Body 1.60x0.80mm, IPC Low Density"
  rect 1x1.1 smd: 1(-0.7,0) 2(0.7,0)
  body extent -0.9,-0.5 0.9,0.5, height 0.55
SOIC8 [mm]
  rect 2x0.6 smd: 1(0,0)
  oval 2x0.6 smd: 2(0,-1.27) 3(0,-2.54) 4(0,-3.81) 5(5.4,-3.81) 6(5.4,-2.54) 7(5.4,-1.27) 8(5.4,0)
  body extent -0.49,-4.45 5.49,0.45, height 1.35
weidmuller_19A_2p_m [mm]
  round 2.3 hole 1.4: 1(0,0) 2(5.08,0)
  body extent -3.4,-9.94 8.52,2.06, height 9.63

## Part data
"10nF 0603_isns1" "10nF 0603_isns2" "10nF 0603_isns3": library part CMP-2006-04374-1, Manufacturer="AVX Interconnect / Elco", Part Number=06035C-103KAT2A
C1_isns1 C1_isns2 C1_isns3 C2_isns1 C2_isns2 C2_isns3 C24_isns1 C24_isns2 C24_isns3: library part CMP-1036-04410-2, "CAP CER 0.1UF 25V X7R 0805", Capacitance="100 nF", Manufacturer=Yageo, Manufacturer Part Number=CC0805KRX7R8BB104, Package=CC0805-0.85, Temperature="-30°C to +85°C", Temperature Characteristic=X7R, Temperature Range High=+85°C, Temperature Range Low=-30°C, Tolerance=0.1, Voltage Rating="25 V", Automotive=No, Category=Cap, ComponentLink2Description=Datasheet, ComponentLink2URL=http://www.yageo.com/documents/recent/UPY-GPHC_Y5V_6.3V-to-50V_8.pdf, Device Class L1="Passive Components", Device Class L2=Capacitors, Device Class L3="Ceramic Capacitors", Digikey Description="CAP CER 0.1UF 25V X7R 0805", Footprint Url=http://www.yageo.com/exep/pages/download/literatures/UPY-C_GEN_24.pdf, Height=0.95mm, Ipc Land Pattern Name=CAPC200125X85, Lead Free=Yes, Material=Ceramic, Mouser Description="Multilayer Ceramic Capacitors MLCC - SMD/SMT 100nF 25V X7R 10%", Octopart=https://octopart.com/cc0805krx7r8bb104-yageo-39467766, RoHS=TRUE
C11_ch_ctrl_d C11_ch_ctrl_e C11_ch_ctrl_f C13_isns1 C13_isns2 C13_isns3: library part CMP-2000-07546-2, "Cap Ceramic 100nF 50V X7R 10% Pad SMD 0603 +125°C Automotive T/R / CGA3E2X7R1H104K080AA", Capacitance=100nF, Case Code (Imperial)=0603, Case Code (Metric)=1608, Dielectric=X7R, Max Operating Temperature=125°C, Min Operating Temperature=-55°C, Package Quantity=1, Ratings=AEC-Q200, Tolerance=10%, Voltage=50V, Case/Package=0603, Composition=Ceramic, Depth=0.8mm, Height=0.8mm, Lead Free="Lead Free", Length=1.6mm, Mount="Surface Mount", Packaging="Tape and Reel", Radiation Hardening=No, REACH SVHC="No SVHC", Termination=SMD/SMT, Thickness=0.035inch, Voltage Rating=50V, Voltage Rating (DC)=50V, Weight=7.1E-05oz, Width=0.8mm
D2_isns1 D2_isns2 D2_isns3 D3_isns1 D3_isns2 D3_isns3: library part CMP-07163-000008-1, "DIODE GEN PURP 75V 200MA SOD523F", Capacitance=4pF, Forward Current=300mA, Manufacturer="ON Semiconductor", Max Junction Temp=+150°C, Max Repetitive Reverse Voltage=75V, Package=502-01, Peak Reverse Current=5uA, Reverse Voltage=100V, Temperature="-55°C to +150°C", Temperature Range Low=-55°C, Automotive=No, Category=Diode, ComponentLink2Description=Datasheet, ComponentLink2URL=https://www.onsemi.com/pub/Collateral/1N914BWT-D.pdf, Device Class L1="Discrete Semiconductors", Device Class L2=Diodes, Device Class L3="Rectifier Diodes", Digikey Description="DIODE GEN PURP 75V 200MA SOD523F", Footprint Url=https://www.onsemi.com/pub/Collateral/502-01.PDF, Height=0.7mm, Ipc Land Pattern Name=SODFL16080X60, Lead Free=Yes, Manufacturer Part Number=1N914BWT, Mouser Description="Diodes - General Purpose, Power, Switching SINGLE JUNC. 100V 4.0NS COMP", Octopart=https://octopart.com/1n914bwt-on+semiconductor-84323166, RoHS=TRUE, Temperature Range High=+150°C
J1_ch_ctrl_d J1_ch_ctrl_e J1_ch_ctrl_f: "Connector Block 19A Male Receptor", Supplier Part Number 1=281-4354-ND, Supplier 1=Digi-Key
J2: Supplier Part Number 1=1175-1637-ND, Supplier 1=Digi-Key
J3: "Mating Product : 952-2565-ND", Supplier Part Number 1=952-2652-1-ND, Supplier 1=Digi-Key
P5_ch_ctrl_d P5_ch_ctrl_e P5_ch_ctrl_f P6_ch_ctrl_d P6_ch_ctrl_e P6_ch_ctrl_f P11_ch_ctrl_d P11_ch_ctrl_e P11_ch_ctrl_f: library part "Header 4X2", "Header, 4-Pin, Dual row", LatestRevisionDate=17-Jul-2002, LatestRevisionNote="Re-released for DXP Platform.", Publisher="Altium Limited", System=Connector
P7_ch_ctrl_d P7_ch_ctrl_e P7_ch_ctrl_f P10_ch_ctrl_d P10_ch_ctrl_e P10_ch_ctrl_f: "Header, 8-Pin", LatestRevisionDate=17-Jul-2002, LatestRevisionNote="Re-released for DXP Platform.", Publisher="Altium Limited"
P8_ch_ctrl_d P8_ch_ctrl_e P8_ch_ctrl_f: "Header, 4-Pin", LatestRevisionDate=17-Jul-2002, LatestRevisionNote="Re-released for DXP Platform.", Publisher="Altium Limited"
R1_ch_ctrl_d R1_ch_ctrl_e R1_ch_ctrl_f R2_ch_ctrl_d R2_ch_ctrl_e R2_ch_ctrl_f R3_ch_ctrl_d R3_ch_ctrl_e R3_ch_ctrl_f R4_ch_ctrl_d R4_ch_ctrl_e R4_ch_ctrl_f: "Resistor", LatestRevisionDate=17-Jul-2002, LatestRevisionNote="Re-released for DXP Platform.", PackageDescription="Axial Device, Thru-Hole; 2 Leads; 0.3 in Pin Spacing", PackageReference=AXIAL-0.3, Published=8-Jun-2000, Publisher="Altium Limited"
R5_isns1 R5_isns2 R5_isns3 R6_isns1 R6_isns2 R6_isns3: library part CMP-2000-00874-1, "ERA-3AEB103V", Manufacturer=Panasonic, Part Number=ERA-3AEB103V
R7 R13_isns1 R13_isns2 R13_isns3 R14_isns1 R14_isns2 R14_isns3 R15_isns1 R15_isns2 R15_isns3 R16_isns1 R16_isns2 R16_isns3: library part Res1, "Resistor", LatestRevisionDate=17-Jul-2002, LatestRevisionNote="Re-released for DXP Platform.", PackageDescription="Axial Device, Thru-Hole; 2 Leads; 0.3 in Pin Spacing", PackageReference=AXIAL-0.3, Published=8-Jun-2000, Publisher="Altium Limited"
U1_ch_ctrl_d U1_ch_ctrl_e U1_ch_ctrl_f: library part CMP-0055-01329-3, "Tiny Low power Operational Amplifier with Rail-to-Rail Input and Output, 5-pin SOT-23, Pb-Free", Manufacturer="Texas Instruments", Package Reference=DBV0005A, PackageTopMarking=AT6A*XTT, PowerWise=N, ComponentLink1Description="Datasheet URL", ComponentLink1URL=http://www.ti.com/general/docs/lit/getliterature.tsp?genericPartNumber=LMC7101Q-Q1&fileType=pdf, CompType=Amplifiers, PackageDescription="Molded SOT-23, .115 x .063 x .040 in Body, 5 Lead, .0375 in Pitch", PinCount=5, RoHS=Y
U3_isns1 U3_isns2 U3_isns3: "TMCS1100A1QDR / 50mV/A , 1.8mOhm , 3V-5.5V", Supplier Part Number 1=296-TMCS1100A1QDRCT-ND, Supplier 1=Digi-Key
U6_isns1 U6_isns2 U6_isns3: library part CMP-0359-00848-2, "Dual Channel, Low Noise, CMOS Operational Amplifier, RRO, 50 MHz Typical GBW, 35 V/us Typical SR, 2.8 to 6 V, 8-Pin SOP (MS8-8), High Temperature / Automotive, Pb-Free, Reel", Linear Technology Part Number=LTC6244, Manufacturer="Linear Technology", Channels (#)=2, ComponentLink1Description="Manufacturer URL", ComponentLink1URL=http://www.linear.com/, ComponentLink2Description=Datasheet, ComponentLink2URL=http://cds.linear.com/docs/en/datasheet/6244fb.pdf, ComponentLink3Description="Package Specification", ComponentLink3URL=http://cds.linear.com/docs/en/packaging/05081610_G_SO8.pdf, DatasheetVersion="Rev. B", GBW (MHz) Typical=50, Is (mA) Typical=6.25, Mounting Technology="Surface Mount", PackageDescription="8-Lead Plastic Small Outline, Body 3.9 x 4.9 mm, Pitch 1.27 mm", PackageReference=LT-MS8-8, PackageVersion="Rev G", Packing=Reel, PartNumber=LTC6244HMS8#TRPBF, RevisionNote="URLs updated", RoHS=Pb-Free, SR (V/us) Typical=35, Type=VFB, Vos (mV) Typical=0.04, Vs Max (V)=6, Vs Min (V)=2.8

## Via types
v1: diameter 0.8, hole 0.4, Top Layer to Bottom Layer, 97 vias
v2: diameter 0.8, hole 0.4, Top Layer to Bottom Layer, tented both sides, 12 vias

## Nets (pads, with @x,y where several pads share a name; then routed paths per layer and width w, separated by ;. In a path a pad name is that pad's centre, name@x,y a point inside that pad or via, vN(x,y) a via of type N, cw(c..) or ccw(c..) an arc to the next point about the centre after c; other vN are vias at no path point)
+3.3: J2.3 J2.4 P5_ch_ctrl_d.2 P5_ch_ctrl_d.4 P5_ch_ctrl_e.2 P5_ch_ctrl_e.4 P5_ch_ctrl_f.2 P5_ch_ctrl_f.4 P6_ch_ctrl_d.2 P6_ch_ctrl_d.4 P6_ch_ctrl_e.2 P6_ch_ctrl_e.4 P6_ch_ctrl_f.2 P6_ch_ctrl_f.4 P11_ch_ctrl_d.2 P11_ch_ctrl_d.4 P11_ch_ctrl_e.2 P11_ch_ctrl_e.4 P11_ch_ctrl_f.2 P11_ch_ctrl_f.4 | length 100.9
  Int1 (GND) w0.635: v1(75.674,-6.069) 93.931,-6.069 98,-2 ; v1(78,46.75) 99.75,46.75 107,54 107,58.25
  Int2 (PWR) w0.635: v1(58.75,-6) 67.161,-6 67.231,-6.069 v1(75.674,-6.069) ; v1(65.5,46.75) v1(78,46.75)
  Bottom Layer w0.254: v1(72.213,99.169) 72.213,99.059 72.524,98.747 J2.4@72.524,88.103
+3ref: C1_isns1.2 C1_isns2.2 C1_isns3.2 J2.7 J2.8 R5_isns1.2 R5_isns2.2 R5_isns3.2 | length 219.8
  Top Layer w0.635: v1(95.81,-11.23) 95.004,-10.424 95.004,23.239 v1(95.814,24.049) ; v1(96.003,77.011) 95.382,76.39 95.382,48.976 v1(96.057,48.302)
  Int2 (PWR) w0.635: v1@70.294,84.823 87.757,84.823 95.81,76.77 96.003,76.963 v1(96.003,77.011) ; v1(95.81,-11.23) 95.81,-15.659 v1(107.374,-27.223) ; v1(95.814,24.049) 95.814,35.951 95.711,36.054 95.711,47.911 96.057,48.257 v1(96.057,48.302) 107.171,37.187 v1(107.171,35.252)
  Int2 (PWR) w1.27: v1(69.991,94.935) 101.709,94.935 101.935,94.709 106.969,94.709 v1(107.411,95.151)
  Bottom Layer w0.254: J2.7@69.81,92.293 69.81,92.73 70.003,92.923 69.996,92.931 69.996,94.93 v1(69.991,94.935)
  Bottom Layer w0.305: J2.8@69.993,88.242 69.993,86.196 70.31,85.879 70.31,84.856 v1(70.276,84.823)
  Bottom Layer w0.635: J2.8@70,88.666 70,92.293 J2.7@70,92.73 ; v1(107.171,35.252) 107.389,35.252 R5_isns2.2@108.6,36.463 108.6,36.392 110.58,34.412 C1_isns2.2@110.58,34.341 ; v1(107.374,-27.223) 108.738,-25.859 R5_isns1.2@108.738,-25.789 ; v1(107.411,95.151) 107.411,95.206 R5_isns3.2@108.656,96.451 108.656,96.38 110.636,94.4 C1_isns3.2@110.636,94.33 ; R5_isns1.2@108.738,-25.86 110.718,-27.84 C1_isns1.2@110.718,-27.911
+5: C11_ch_ctrl_d.1 C11_ch_ctrl_e.1 C11_ch_ctrl_f.1 C13_isns1.1 C13_isns2.1 C13_isns3.1 C24_isns1.2 C24_isns2.2 C24_isns3.2 J2.1 J2.2 P8_ch_ctrl_d.4 P8_ch_ctrl_e.4 P8_ch_ctrl_f.4 U1_ch_ctrl_d.2 U1_ch_ctrl_e.2 U1_ch_ctrl_f.2 U3_isns1.8 U3_isns2.8 U3_isns3.8 U6_isns1.8 U6_isns2.8 U6_isns3.8 | length 114.3
  Int1 (GND) w0.635: 93.81,97.77 94.611,96.969 v1(118.447,96.969) ; 94.31,-19.23 113.337,-19.23 v1(116.681,-22.574) ; 98.31,41.77 114.441,41.77 v1(116.674,39.537)
  Bottom Layer w0.254: J2.2@73.652,88.593 73.612,88.674 J2.2@73.81,88.666 ; J2.2@73.81,88.27 J2.2@73.821,88.281 ; J2.1@73.81,92.73 73.81,92.554 J2.1@74.008,92.356 ; C11_ch_ctrl_d.1@87.755,-4.648 87.88,-4.648 88.231,-4.297 88.231,-4.241 88.38,-4.093 89.511,-4.093 89.78,-3.824 90.493,-3.824 91.211,-3.106 v2(91.211,-1.856) ; C11_ch_ctrl_e.1@87.782,56.648 87.907,56.648 88.258,56.999 88.258,57.055 88.407,57.203 89.538,57.203 89.807,57.472 90.52,57.472 91.238,58.19 v2(91.238,59.44) ; C11_ch_ctrl_f.1@88.012,117.394 88.137,117.394 88.488,117.745 88.488,117.801 88.637,117.95 89.768,117.95 90.037,118.218 90.75,118.218 91.468,118.936 v2(91.468,120.186) ; P8_ch_ctrl_f.4@90.543,125.01 90.713,124.839 90.713,123.867 v1(91.31,123.27) ; v1(116.674,39.537) 116.778,39.433 116.778,39.032 117.21,38.6 C24_isns2.2@117.21,38.108 117.369,37.949 117.369,37.456 117.21,37.297 117.21,36.97 116.676,36.436 116.676,36.21 U3_isns2.8@116.968,35.918 ; v1(116.681,-22.574) 117.348,-23.241 C24_isns1.2@117.348,-24.144 117.507,-24.303 117.507,-24.796 117.348,-24.955 117.348,-25.282 116.814,-25.816 116.814,-26.042 U3_isns1.8@117.106,-26.334 ; U3_isns3.8@117.025,95.906 116.732,96.199 116.732,96.425 117.266,96.958 117.266,97.286 117.425,97.445 C24_isns3.2@117.425,97.937 ; C24_isns3.2@117.266,98.096 C24_isns3.2@117.425,97.937 ; v1(118.447,96.969) 118.393,96.969 C24_isns3.2@117.425,97.937
  Bottom Layer w0.508: J2.2@73.821,88.281 v1(74.992,88.281) ; J2.1@74.008,92.356 v1(75.055,92.356)
  Bottom Layer w0.635: v1(84.135,-20.542) 84.142,-20.542 85.072,-21.472 C13_isns1.1@85.296,-21.472 86.516,-20.252 87.223,-20.252 ; v1(93.763,37.367) 93.763,37.337 94.807,36.293 C13_isns2.1@94.949,36.293 96.169,37.513 96.876,37.513 ; v1(97.133,102.507) 97.165,102.475 97.165,102.055 97.869,101.351 C13_isns3.1@97.869,101.124 99.088,102.344 99.795,102.344
AGND: "10nF 0603_isns1.1" "10nF 0603_isns2.1" "10nF 0603_isns3.1" C2_isns1.1 C2_isns2.1 C2_isns3.1 C11_ch_ctrl_d.2 C11_ch_ctrl_e.2 C11_ch_ctrl_f.2 C13_isns1.2 C13_isns2.2 C13_isns3.2 C24_isns1.1 C24_isns2.1 C24_isns3.1 J2.9 J2.13 J2.14 J2.17 J2.18 P8_ch_ctrl_d.1 P8_ch_ctrl_e.1 P8_ch_ctrl_f.1 R4_ch_ctrl_d.1 R4_ch_ctrl_e.1 R4_ch_ctrl_f.1 R6_isns1.1 R6_isns2.1 R6_isns3.1 R7.1 R16_isns1.1 R16_isns2.1 R16_isns3.1 U1_ch_ctrl_d.5 U1_ch_ctrl_e.5 U1_ch_ctrl_f.5 U3_isns1.5 U3_isns2.5 U3_isns3.5 U6_isns1.4 U6_isns2.4 U6_isns3.4 | length 62.8
  Bottom Layer w0.254: v1(63.253,86.056) 63.253,86.19 63.54,86.478 J2.18@63.54,88.242 ; v1(63.336,94.909) 63.336,94.762 63.638,94.46 J2.17@63.638,92.277 ; v1(65.811,85.925) 65.811,86.038 66.12,86.347 J2.14@66.12,88.109 ; v1(65.862,95.041) 65.862,94.893 66.19,94.565 66.19,93.988 66.18,93.978 J2.13@66.002,93.978 ; J2.13@66.19,92.73 66.342,92.578 66.342,90.925 66.699,90.568 68.079,90.568 68.624,91.113 68.624,92.624 J2.9@68.73,92.73 ; v1(68.483,95.51) 68.483,94.727 68.609,94.602 J2.9@68.609,92.73 ; C13_isns1.2@83.846,-22.922 83.935,-23.01 83.935,-23.506 83.623,-23.818 83.623,-24.205 v1(83.977,-24.559) ; v2(87.55,-0.126) 87.55,-1.037 R4_ch_ctrl_d.1@87.628,-1.115 ; v2(87.577,61.17) 87.577,60.259 R4_ch_ctrl_e.1@87.655,60.181 ; v2(87.698,-7.552) 87.747,-7.504 87.747,-7.332 87.755,-7.324 C11_ch_ctrl_d.2@87.755,-6.698 ; v2(87.725,53.744) 87.774,53.792 87.774,53.964 87.782,53.972 C11_ch_ctrl_e.2@87.782,54.598 ; v2(87.807,121.917) 87.807,121.006 R4_ch_ctrl_f.1@87.885,120.927 ; v2(87.955,114.49) 88.004,114.539 88.004,114.71 88.012,114.718 C11_ch_ctrl_f.2@88.012,115.344 ; 89.096,-26.015 89.896,-26.815 v1(89.896,-26.928) ; R16_isns1.1@90.334,-24.778 90.999,-25.442 91.225,-25.442 91.225,-25.696 v1(91.23,-25.701) ; U6_isns1.4@91.695,-18.926 91.78,-18.926 v1(92.462,-19.609) ; U1_ch_ctrl_d.5@92.472,-4.887 92.747,-4.887 93.374,-4.26 93.374,-4.057 v2(93.478,-3.952) ; U1_ch_ctrl_e.5@92.499,56.409 92.774,56.409 93.401,57.036 93.401,57.239 v2(93.505,57.344) ; U1_ch_ctrl_f.5@92.729,117.155 93.004,117.155 93.631,117.782 93.631,117.986 v2(93.735,118.09) ; C13_isns2.2@93.5,34.844 93.588,34.755 93.588,34.259 93.277,33.948 93.277,33.56 v1(93.631,33.207) ; C13_isns3.2@96.419,99.674 96.507,99.586 96.507,99.089 96.196,98.778 96.196,98.391 v1(96.55,98.037) ; 98.75,31.75 99.55,30.95 v1(99.55,30.838) ; R16_isns2.1@99.987,32.987 100.652,32.323 100.878,32.323 100.878,32.069 v1(100.884,32.064) ; U6_isns2.4@101.349,38.839 101.433,38.839 v1(102.116,38.156) ; 101.669,96.581 101.886,96.581 v1(102.469,95.998) ; R16_isns3.1@102.907,97.818 103.55,98.462 103.929,98.462 v1(104.034,98.566) ; U6_isns3.4@104.268,103.67 104.353,103.67 v1(105.035,102.987) ; R6_isns2.1@112.366,40.228 112.366,40.251 v1(112.425,40.31) ; R6_isns3.1@112.422,100.216 112.609,100.216 v1(113.441,101.049) ; R6_isns1.1@112.503,-22.024 112.503,-21.941 v1(113.38,-21.064) ; v1(112.832,92.949) 112.936,93.054 113.362,93.054 113.812,93.504 114.038,93.504 U3_isns3.5@114.33,93.212 ; v1(112.913,-29.291) 113.018,-29.186 113.443,-29.186 113.894,-28.736 114.12,-28.736 U3_isns1.5@114.412,-29.028 ; v1(113.524,39.257) 114.462,38.319 C2_isns2.1@114.558,38.319 ; C2_isns3.1@114.614,98.307 114.455,98.466 114.455,99.45 114.658,99.653 v1(114.658,99.801) ; C2_isns1.1@114.695,-23.933 114.569,-23.807 114.569,-23.315 114.781,-23.103 v1(114.781,-22.322) ; v1(117.494,40.521) 118.518,39.497 C24_isns2.1@118.518,39.416 ; C24_isns3.1@118.574,99.404 118.584,99.394 119.076,99.394 v1(119.632,99.949) ; C24_isns1.1@118.656,-22.836 118.666,-22.846 119.158,-22.846 v1(119.713,-22.291)
  Bottom Layer w0.5: v1(112.122,34.169) 113.103,34.169 113.487,33.785 113.713,33.785 U3_isns2.5@114.274,33.224
brdg_en_chd: J3.5 P6_ch_ctrl_d.1 P11_ch_ctrl_d.1 | length 134
  Int1 (GND) w0.254: v1(71.005,17.795) 71.027,17.772 87.478,17.772 v1(87.5,17.75)
  Int2 (PWR) w0.254: v1(87.5,17.75) 95,17.75 107,5.75 v1(107,4.75)
  Bottom Layer w0.254: J3.5@32.73,50.27 32.73,46.278 61.323,17.685 66.035,17.685 66.145,17.795 v1(71.005,17.795) ; P11_ch_ctrl_d.1@104.416,-0.131 104.984,-0.699 104.984,-0.735 105.999,-1.75 133.219,-1.75 134.227,-0.742 134.227,-0.728 135.038,0.083 P6_ch_ctrl_d.1@135.052,0.083 ; P11_ch_ctrl_d.1@104.619,0.009 104.619,0.282 107,2.663 v1(107,4.75)